# Altium PCB PCB1.PcbDoc
Units mm, origin at the board's own origin, x right, y up, seen from the top; angles counter-clockwise.
Board outline 28.38 x 43.64 mm, 4 copper layers (Top Layer, Signal Layer 1, Signal Layer 2, Bottom Layer), stack 0.756 mm thick; 27 components, 22 nets, 134 pads, 41 vias.
Unrouted connection lines stored in the file: 2.
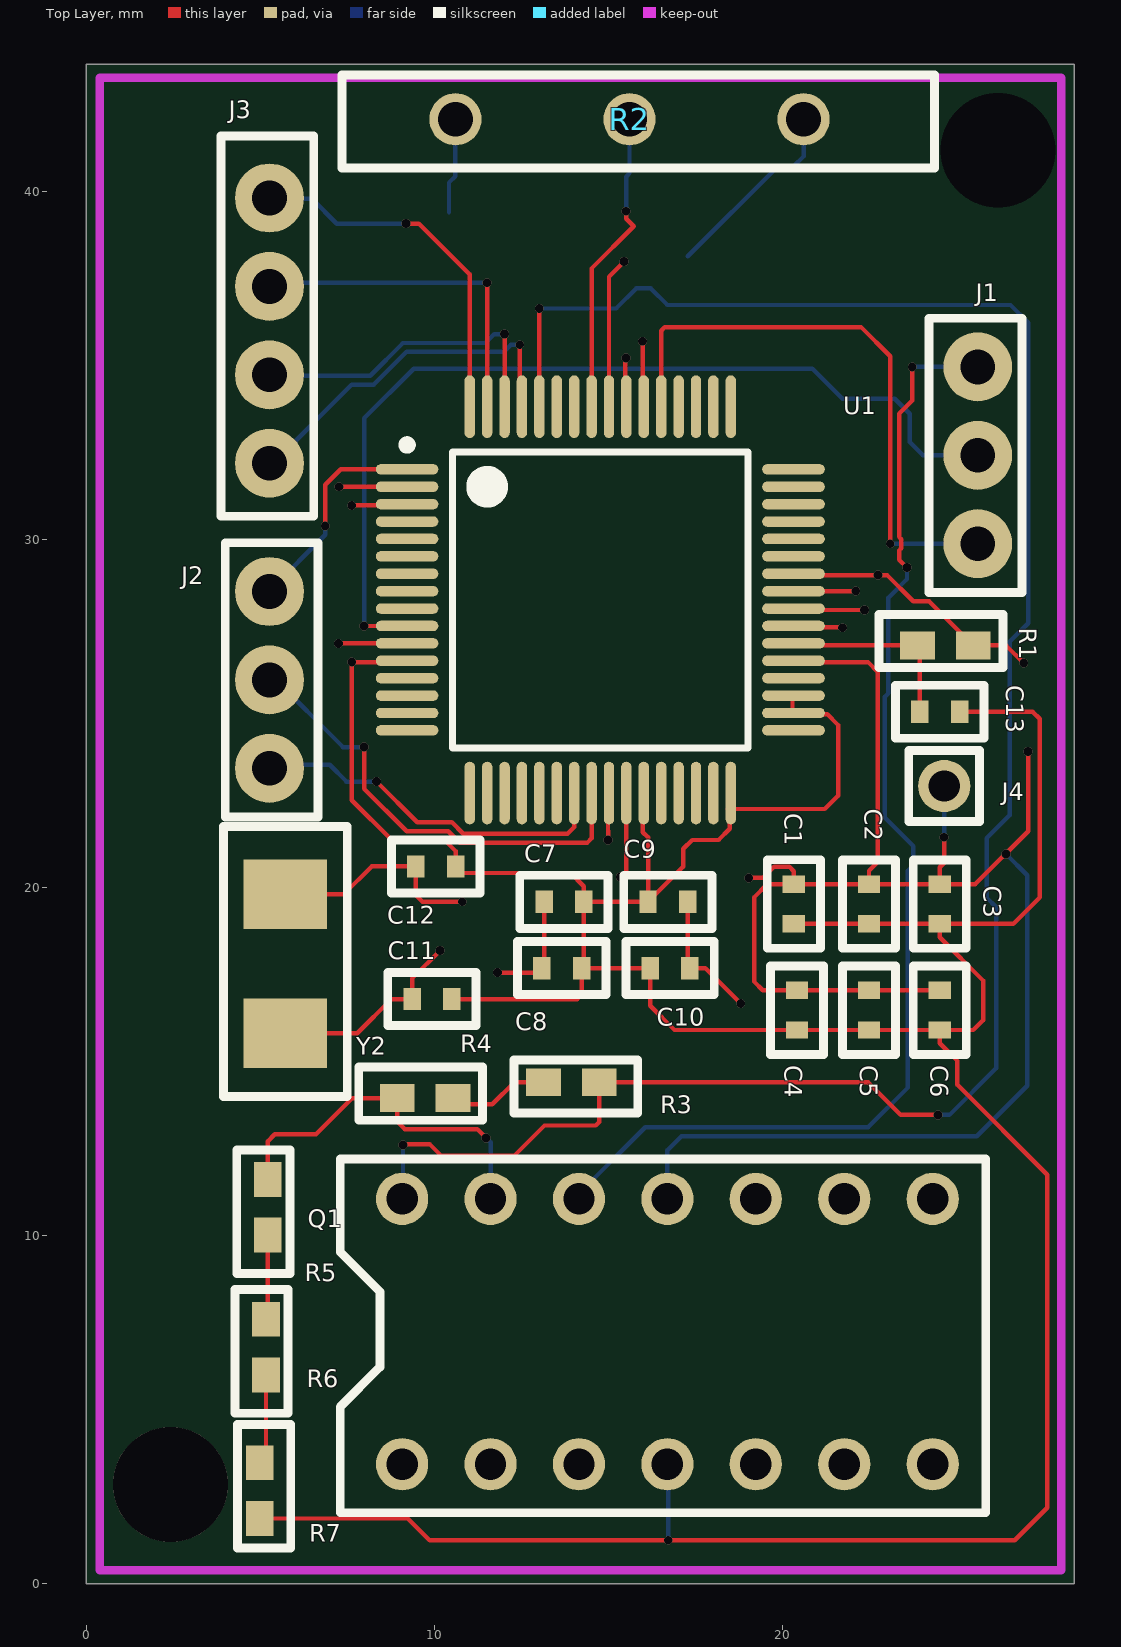
[diagram p0: Top Layer view]
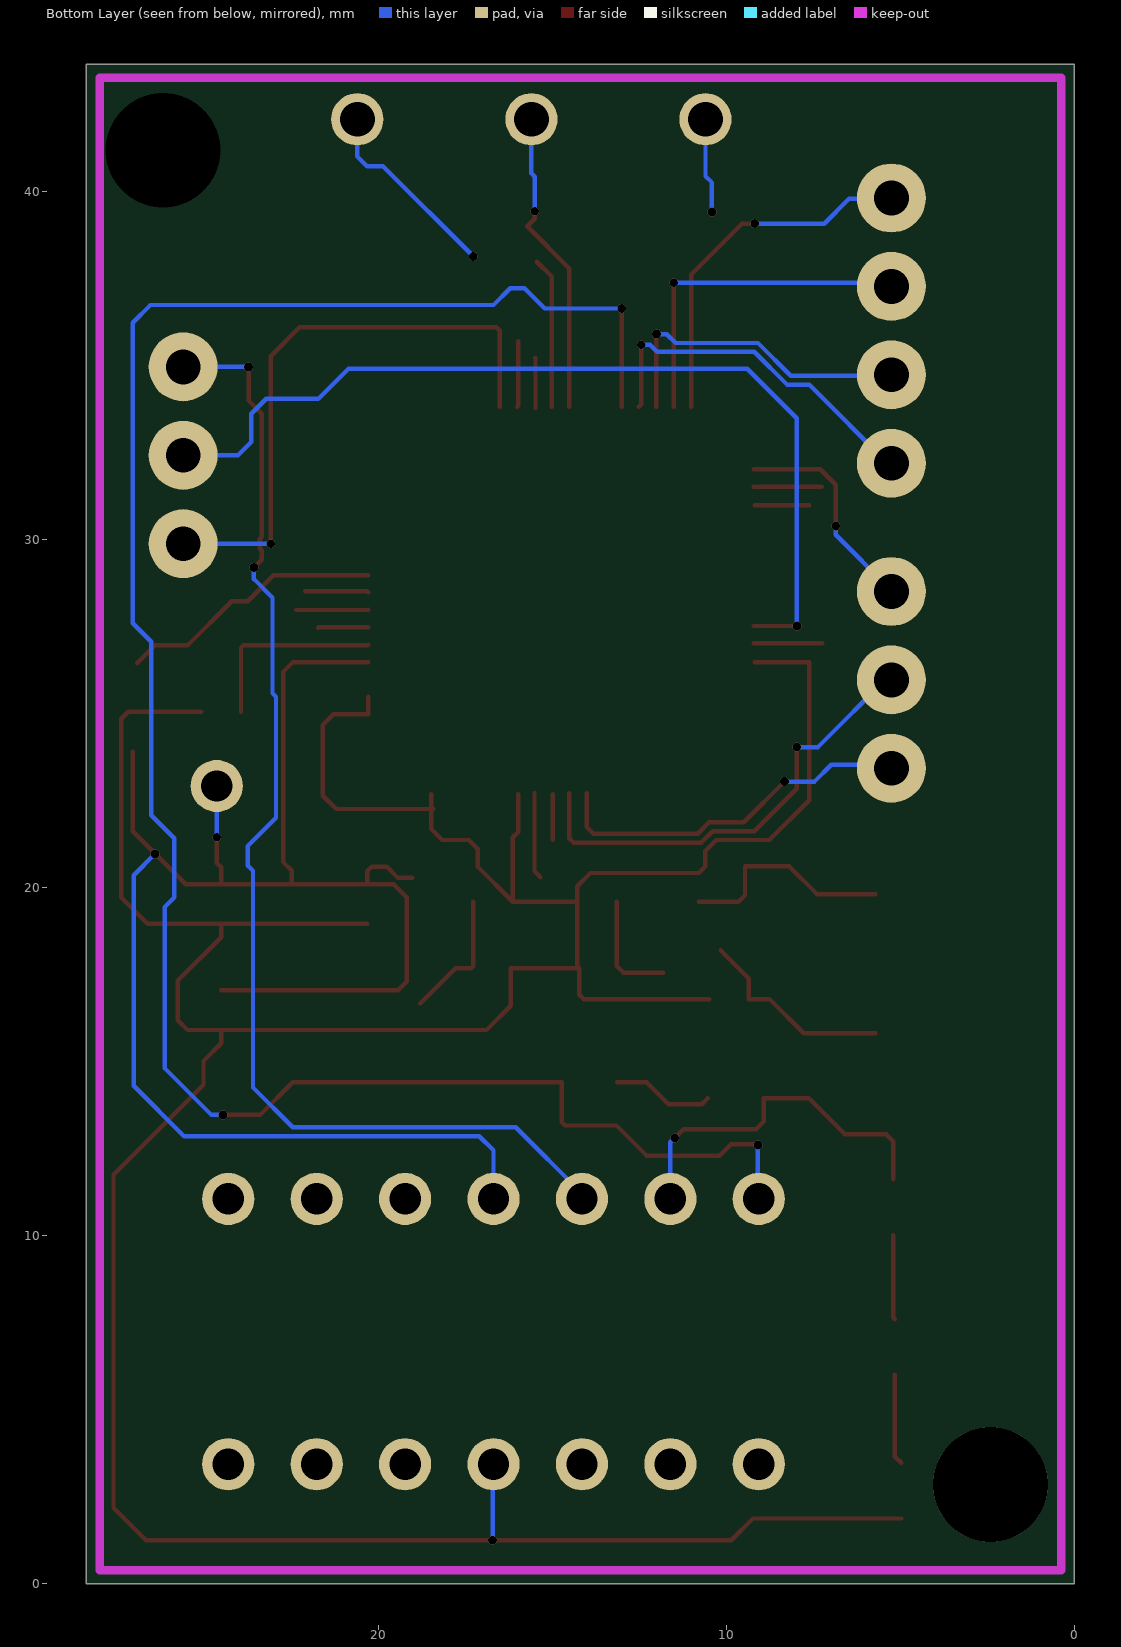
[diagram p1: Bottom Layer view, seen from below]
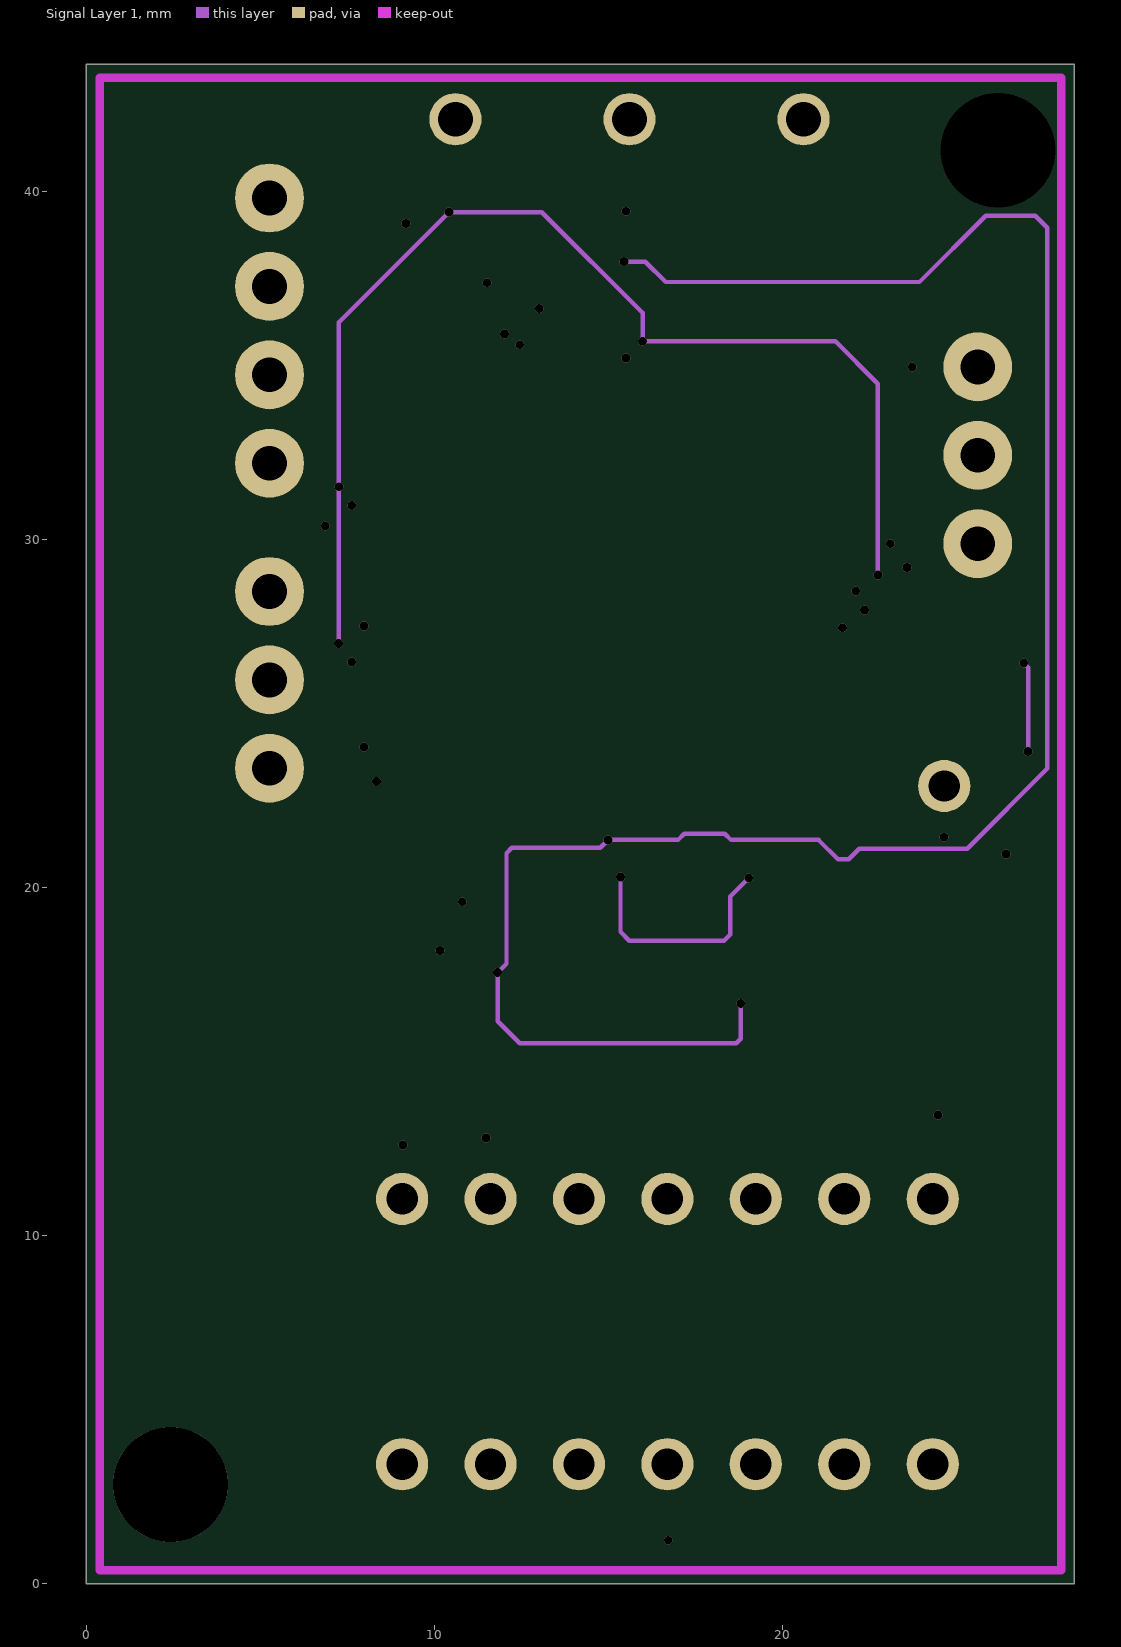
[diagram p2: Signal Layer 1]
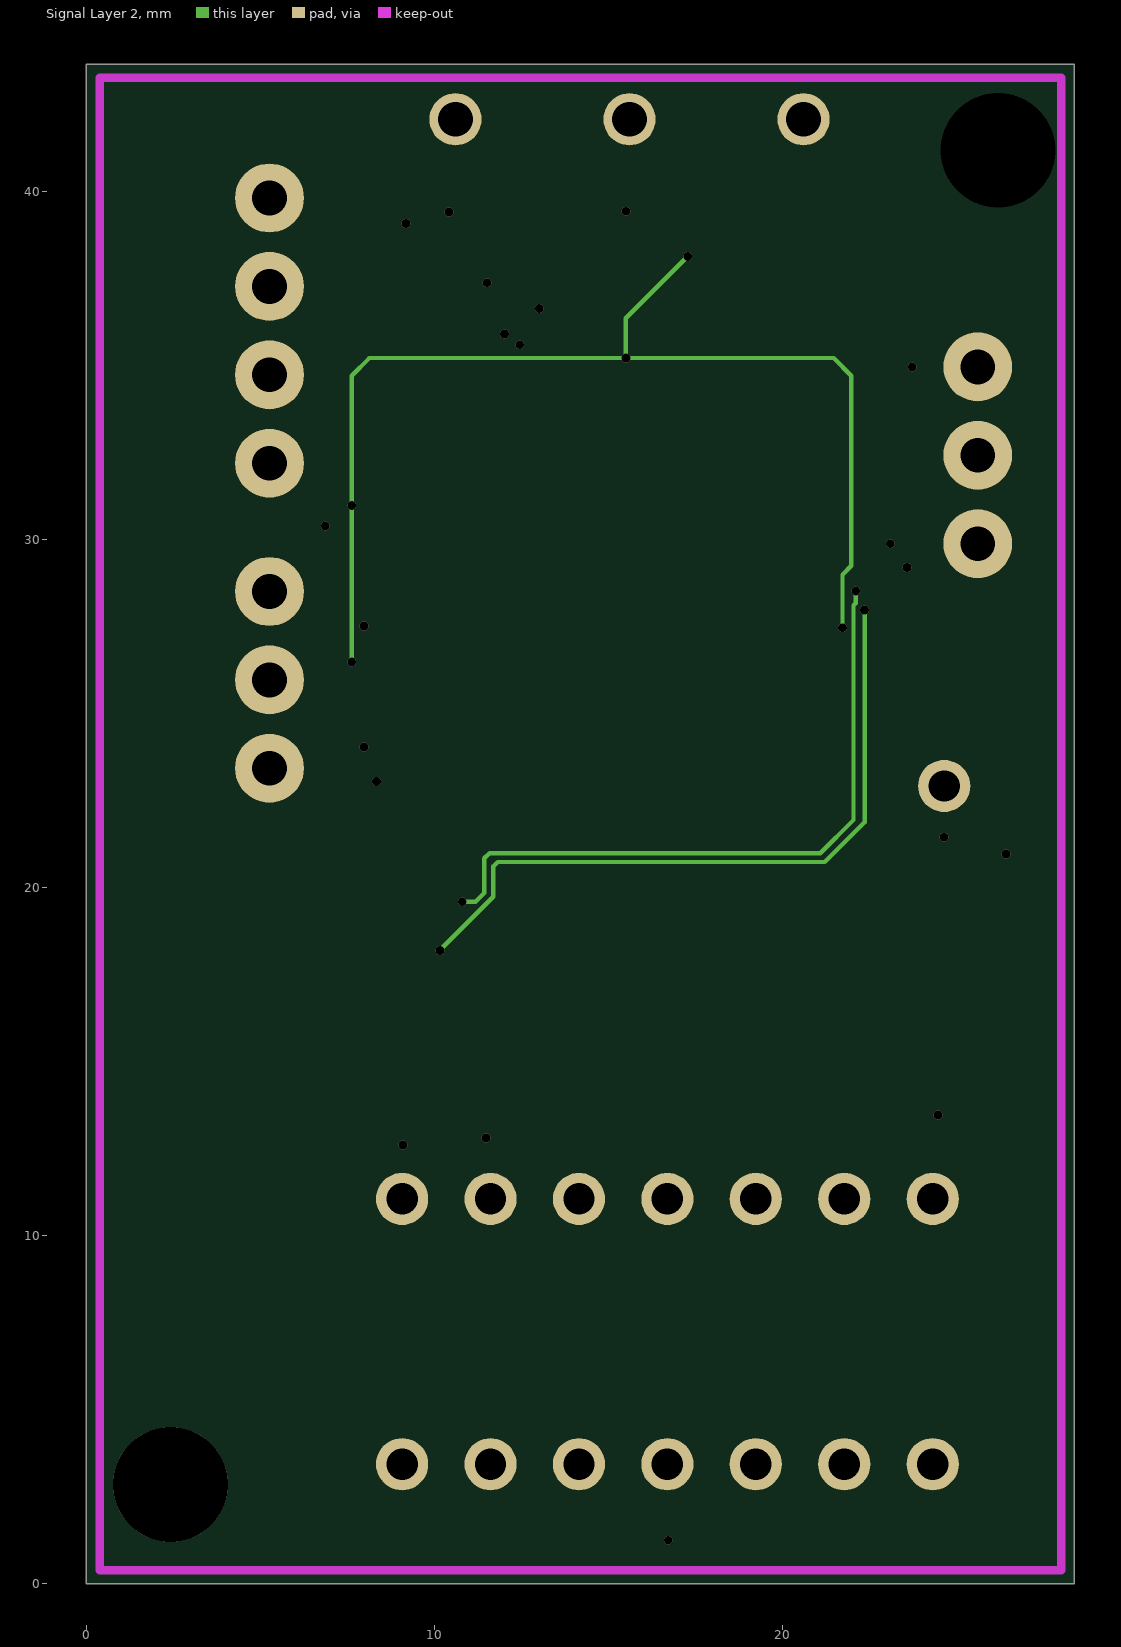
[diagram p3: Signal Layer 2]

## Layer stack, top to bottom
Top Solder: solder mask 0.0102, Solder Resist, Dk 3.5
Top Layer: signal copper 0.0432
Dielectric 1: core 0.254, FR-4, Dk 4.2
Signal Layer 1: signal copper 0.0175
Dielectric 3: prepreg 0.127, Dk 4.2
Signal Layer 2: signal copper 0.0175
Dielectric 2: core 0.254, Dk 4.2
Bottom Layer: signal copper 0.0432
Bottom Solder: solder mask 0.0102, Solder Resist, Dk 3.5

## Board outline
0,0 28.381,0 28.381,43.637 0,43.637

## Design rules (kind name [scope] priority, off if disabled: settings)
Clearance [All] p1: gap=0.127 ignorepadtopadclearanceinfootprint=FALSE
PolygonConnect [All] p1: connectstyle=Relief reliefconductorwidth=0.254 reliefentries=4 polygonreliefangle="90 Angle" airgapwidth=0.254
RoutingVias [All] p1: holewidth=0.254 width=0.102 viastyle="Through Hole" minholewidth=0.254 minwidth=0.102 maxholewidth=0.254 maxwidth=0.102
SolderMaskExpansion [All] p1: expansion=0.102
Width [All] p1: maxlimit=1 minlimit=0.127 preferedwidth=0.127
30 further rules are at their usual default settings.

## Classes and differential pairs
component class Esquematico_microcotrolador_actuador1: C1 C2 C3 C4 C5 C6 C7 C8 C9 C10 C11 C12 C13 Q1 R1 R2 R3 R4 R5 R6 R7 U1 Y2

## Components (designator, comment, footprint, x,y, rotation, side; value= is the part's Value field where it differs from the comment)
C1 "0.01uF" Capacitor 20.32,19.521 r90 top
C2 "0.1uF" Capacitor 22.479,19.518 r90 top
C3 "0.01uF" Capacitor 24.511,19.518 r90 top
C4 "0.1uF" Capacitor 20.414,16.47 r90 top
C5 "0.01uF" Capacitor 22.479,16.47 r90 top
C6 "1.0uF" Capacitor 24.511,16.47 r90 top
C7 "0.1uF" Capacitor 13.716,19.583 r180 top
C8 "0.1uF" Capacitor 13.654,17.678 r180 top
C9 "1.0uF" Capacitor 16.702,19.583 r0 top
C10 "2.2uF" Capacitor 16.764,17.678 r0 top
C11 "10pF" Capacitor 9.924,16.789 r0 top
C12 "10pF" Capacitor 10.033,20.599 r0 top
C13 "0.1uF" Capacitor 24.511,25.044 r180 top
J1 "HEADERS" 2_PIN_HEADER 25.603,29.87 r90 top
J2 "HEADERS" 2_PIN_HEADER 5.258,28.499 r270 top
J3 "4_HEADERS" 4_HEADERS 5.258,32.182 r90 top
J4 "1_HEADER" 1_HEADER 24.638,22.911 r0 top
Q1 "Op-amp" Op-amp 9.068,11.049 r0 top
R1 "10k" resistencia 24.676,26.949 r0 top
R2 "potenciometro" Potenciometro 15.599,42.062 r180 top
R3 "1k" resistencia 13.932,14.402 r180 top
R4 "2.7k" resistencia 9.728,13.945 r0 top
R5 "47" resistencia 5.207,10.808 r90 top
R6 "1k" resistencia 5.156,6.794 r90 top
R7 "10k" resistencia 4.978,2.667 r270 top
U1 "TM4C123GH6PMI7" PM0064A_N 14.76,28.257 r0 top
Y2 "Cristal_16MHz" cristal_16MHz 5.715,17.805 r90 top

## Footprints (in the part's own frame and the unit in brackets; to place one, negate y for a bottom-side part, rotate by r counter-clockwise, add the part's x,y. Pads: shape width x height; smd on the part's side, far side on the other; paste and mask are expansions set on the pad)
1_HEADER [mm]
  round 1.5 hole 0.9: 1(0,0)
  silkscreen extent -1.02,-1.02 1.02,1.02
2_PIN_HEADER [mm]
  round 1.98 hole 1: 1(0,0) 2(2.54,0) 3(5.08,0)
  silkscreen extent -1.4,-1.27 6.48,1.4
4_HEADERS [mm]
  round 1.98 hole 1: 1(0,0) 2(2.54,0) 3(5.08,0) 4(7.62,0)
  silkscreen extent -1.52,-1.27 9.4,1.4
Capacitor [mm]
  rect 0.5x0.64 smd: 1(-0.57,0)
  rect 0.5x0.64 smd mask+0.102: 2(0.57,0)
  silkscreen extent -1.27,-0.76 1.27,0.76, body extent -0.5,-0.25 0.5,0.25, height 0.5
cristal_16MHz [mm]
  rect 2x2.4 smd: 1(-2,0) 2(2,0)
  silkscreen extent -3.81,-1.78 3.94,1.78, body extent -2.44,-1.6 2.56,1.6, height 1.31
Op-amp [mm]
  round 1.5 hole 0.9: 1(0,0) 2(2.54,0) 3(5.08,0) 4(7.62,0) 5(10.16,0) 6(12.7,0) 7(15.24,0) 8(15.24,-7.62) 9(12.7,-7.62) 10(10.16,-7.62) 11(7.62,-7.62) 12(5.08,-7.62) 13(2.54,-7.62) 14(0,-7.62)
  silkscreen extent -1.78,-9.02 16.76,1.14, body extent -1.27,-7.87 16.51,0, height 4.3
PM0064A_N [mm]
  oval 1.8x0.3 smd paste-0.102 mask+0.051: 1(-5.55,3.75) 2(-5.55,3.25) 3(-5.55,2.75) 4(-5.55,2.25) 5(-5.55,1.75) 6(-5.55,1.25) 7(-5.55,0.75) 8(-5.55,0.25) 9(-5.55,-0.25) 10(-5.55,-0.75) 11(-5.55,-1.25) 12(-5.55,-1.75) 13(-5.55,-2.25) 14(-5.55,-2.75) 15(-5.55,-3.25) 16(-5.55,-3.75) 33(5.55,-3.75) 34(5.55,-3.25) 35(5.55,-2.75) 36(5.55,-2.25) 37(5.55,-1.75) 38(5.55,-1.25) 39(5.55,-0.75) 40(5.55,-0.25) 41(5.55,0.25) 42(5.55,0.75) 43(5.55,1.25) 44(5.55,1.75) 45(5.55,2.25) 46(5.55,2.75) 47(5.55,3.25) 48(5.55,3.75)
  oval 0.3x1.8 smd paste-0.102 mask+0.051: 17(-3.75,-5.55) 18(-3.25,-5.55) 19(-2.75,-5.55) 20(-2.25,-5.55) 21(-1.75,-5.55) 22(-1.25,-5.55) 23(-0.75,-5.55) 24(-0.25,-5.55) 25(0.25,-5.55) 26(0.75,-5.55) 27(1.25,-5.55) 28(1.75,-5.55) 29(2.25,-5.55) 30(2.75,-5.55) 31(3.25,-5.55) 32(3.75,-5.55) 49(3.75,5.55) 50(3.25,5.55) 51(2.75,5.55) 52(2.25,5.55) 53(1.75,5.55) 54(1.25,5.55) 55(0.75,5.55) 56(0.25,5.55) 57(-0.25,5.55) 58(-0.75,5.55) 59(-1.25,5.55) 60(-1.75,5.55) 61(-2.25,5.55) 62(-2.75,5.55) 63(-3.25,5.55) 64(-3.75,5.55)
  silkscreen extent -5.67,-4.25 4.25,4.57, body extent -5.79,-5.79 5.79,5.79, height 1
Potenciometro [mm]
  round 1.5 hole 1: 1(-5,0) 2(5,0) 3(0,0)
  silkscreen extent -8.76,-1.27 8.25,1.4, body extent -7.97,-22.13 8.13,5.87, height 21.5
resistencia [mm]
  rect 1x0.8 smd: 1(-0.8,0) 2(0.8,0)
  silkscreen extent -1.91,-0.64 1.65,0.89, body extent -0.95,-0.4 0.95,0.4, height 0.45

## Part data
C1 C2 C3 C4 C5 C6 C7 C8 C9 C10 C11 C12 C13: library part CAP_0.01uF, Supplier Part Number 1=587-1223-6-ND, Supplier 1=Digi-Key
R1 R3 R4 R5 R6 R7: library part Resisistencia
U1: "No Description Available", Alternate_PartNumber=TM4C123GH6PMT, Manufacturer="Texas Instruments", PartNumber=TM4C123GH6PMTR, CompType=IC, Copyright="Copyright (C) 2021 Ultra Librarian. All rights reserved.", Manufacturer_Part_Number=TM4C123GH6PMI7, Mfr_Name="Texas Instruments", MountType=SMT, PackageReference=PM0064A, RefDes=RefDes, RoHS=Y, Type=DEV

## Free pads (board coordinates)
  round 1.524 hole 3.3: 40(26.187,41.173)
  round 3.3 hole 3.3: 41(2.413,2.845)

## Via types
v1: diameter 0.254, hole 0.254, Top Layer to Bottom Layer, 19 vias
v2: diameter 0.254, hole 0.254, Top Layer to Signal Layer 1, 12 vias
v3: diameter 0.254, hole 0.254, Top Layer to Signal Layer 2, 8 vias
v4: diameter 0.254, hole 0.254, Signal Layer 1 to Bottom Layer, 1 vias
v5: diameter 0.254, hole 0.254, Signal Layer 2 to Bottom Layer, 1 vias

## Nets (pads, with @x,y where several pads share a name; then routed paths per layer and width w, separated by ;. In a path a pad name is that pad's centre, name@x,y a point inside that pad or via, vN(x,y) a via of type N, cw(c..) or ccw(c..) an arc to the next point about the centre after c; other vN are vias at no path point)
+3.3V: C1.2 C2.2 C3.2 C4.2 C5.2 C6.2 J4.1 Q1.4 R1.2 R2.2 U1.2 U1.11 U1.26 U1.37 U1.42 U1.54 | length 113.8
  Top Layer w0.127: v2(7.239,27.007) U1.11 ; v2(7.253,31.507) U1.2 ; v2(15.342,20.295) 15.51,20.463 U1.26 ; v2(15.977,35.687) 15.977,33.841 U1.54 ; v2(19.025,20.269) 19.431,20.269 19.758,20.596 20.187,20.596 20.32,20.464 C1.2 ; U1.37@20.282,26.469 22.451,26.469 22.733,26.187 22.733,20.726 22.479,20.472 C2.2 ; U1.42@20.282,28.969 v2(22.733,28.969) 22.999,28.969 23.749,28.219 24.206,28.219 R1.2 26.416,26.949 v2(26.924,26.441) ; C6.2 C5.2 C4.2 19.431,17.04 19.177,17.294 19.177,19.71 19.558,20.091 C1.2 ; v1(24.638,21.438) 24.638,20.701 24.511,20.574 C3.2 ; v2(27.051,23.901) 27.051,21.612 25.527,20.088 C3.2 ; C1.2 22.476,20.091 C2.2 ; C2.2 C3.2
  Signal Layer 1 w0.127: v2(7.239,27.007) 7.253,27.021 v2(7.253,31.507) 7.253,36.234 v4(10.414,39.395) 13.081,39.395 15.977,36.5 v2(15.977,35.687) 21.514,35.687 22.733,34.468 v2(22.733,28.969) ; v2(15.342,20.295) 15.342,18.72 15.596,18.466 18.313,18.466 18.491,18.644 18.491,19.736 v2(19.025,20.269) ; v2(26.924,26.441) 27.051,26.314 v2(27.051,23.901)
  Bottom Layer w0.127: v4(10.414,39.395) 10.414,40.244 10.599,40.429 R2.2 ; Q1.4 16.688,12.446 17.094,12.852 25.578,12.852 27.026,14.3 27.026,20.345 v1(26.416,20.955) ; v1(24.638,21.438) J4.1
GND: C1.1 C2.1 C3.1 C4.1 C5.1 C6.1 C7.1 C8.1 C9.1 C10.1 C11.2 C12.2 C13.1 pad.40 pad.41 Q1.11 R2.1 R7.2 U1.3 U1.12 U1.27 U1.32 U1.34 U1.35 U1.39 U1.55 | length 157.2
  Top Layer w0.127: pad.41 2.362,3.581 3.2,2.743 3.2,2.311 pad.41@3.645,1.867 ; R7.2 9.233,1.867 9.855,1.245 v1(16.713,1.245) 26.67,1.245 27.604,2.178 27.604,11.741 25.019,14.326 25.019,15.011 24.511,15.519 C6.1 ; v3(7.62,30.969) U1.3@9.182,30.969 ; U1.12@9.182,26.469 v3(7.62,26.469) 7.62,22.504 8.766,21.358 10.287,21.358 10.603,21.042 C12.2 10.792,20.41 13.905,20.41 14.286,20.029 C7.1 ; C11.2 14.097,16.789 14.224,16.916 C8.1 ; U1.55@15.482,33.769 15.482,35.192 v3(15.494,35.204) ; U1.27@15.982,22.669 15.982,21.585 16.132,21.435 C9.1 ; U1.32@18.482,22.669 U1.32@18.482,22.317 ; U1.35@20.282,25.469 20.282,24.969 21.284,24.969 21.59,24.663 21.59,22.631 21.209,22.25 U1.32@18.482,22.25 ; U1.39@20.282,27.469 21.705,27.469 v3(21.717,27.457) ; C1.1 22.476,18.951 C2.1 C3.1 ; C13.1 27.178,25.044 27.381,24.841 27.381,19.71 26.619,18.948 C3.1 ; 25.298,42.062 pad.40 ; C8.1 C10.1 16.194,16.597 16.891,15.9 C4.1 C5.1 C6.1 ; C8.1 14.286,17.74 C7.1 ; C7.1 C9.1 ; C9.1 17.145,20.596 17.145,21.104 17.399,21.358 18.158,21.358 18.482,21.682 U1.32@18.482,22.25 ; U1.32@18.482,22.25 18.415,22.25 U1.32@18.482,22.317 ; U1.32@18.482,22.25 U1.32@18.482,22.317 ; C6.1 25.476,15.9 25.756,16.18 25.756,17.323 24.511,18.567 C3.1
  Signal Layer 2 w0.127: v3(7.62,26.469) v3(7.62,30.969) 7.62,34.696 8.128,35.204 v3(15.494,35.204) ; v5(17.272,38.125) 15.494,36.347 v3(15.494,35.204) ; v3(21.717,27.457) 21.717,28.981 21.971,29.235 21.971,34.696 21.463,35.204 v3(15.494,35.204)
  Bottom Layer w0.127: Q1.11 16.713,3.404 v1(16.713,1.245) ; v5(17.272,38.125) 19.863,40.716 20.32,40.716 20.599,40.996 R2.1
NetC7_2: C7.2 C8.2 C9.2 C10.2 U1.25 U1.56 | length 72
  Top Layer w0.127: v2(11.811,17.551) 12.957,17.551 C8.2 13.146,17.74 C7.2 ; U1.25@14.982,22.669 14.982,21.629 14.986,21.625 v2(14.986,21.361) ; U1.56 15.01,37.54 v2(15.443,37.973) ; C9.2 17.272,17.74 C10.2 17.78,17.678 v2(18.796,16.662)
  Signal Layer 1 w0.127: v2(15.443,37.973) 16.053,37.973 16.637,37.389 23.927,37.389 25.832,39.294 27.254,39.294 27.604,38.944 27.604,23.413 25.298,21.107 22.2,21.107 21.895,20.803 21.59,20.803 21.031,21.361 18.517,21.361 18.339,21.539 17.17,21.539 16.993,21.361 v2(14.986,21.361) 14.757,21.133 12.217,21.133 12.065,20.98 12.065,17.805 v2(11.811,17.551) 11.811,16.154 12.446,15.519 18.669,15.519 18.796,15.646 v2(18.796,16.662)
NetC11_1: C11.1 U1.40 Y2.1 | length 28.2
  Top Layer w0.127: Y2.1 7.779,15.805 8.763,16.789 C11.1 9.354,17.38 v3(10.16,18.186) ; U1.40@20.282,27.969 20.286,27.965 v3(22.352,27.965)
  Signal Layer 2 w0.127: v3(10.16,18.186) 10.16,18.208 11.684,19.732 11.684,20.599 11.811,20.726 21.209,20.726 22.352,21.869 v3(22.352,27.965)
NetC12_1: C12.1 U1.41 Y2.2 | length 27.5
  Top Layer w0.127: Y2.2 7.398,19.805 8.192,20.599 C12.1 9.463,19.772 9.652,19.583 v3(10.795,19.583) ; U1.41@20.282,28.469 20.32,28.507 v3(22.098,28.507)
  Signal Layer 2 w0.127: v3(10.795,19.583) 11.176,19.583 11.43,19.837 11.43,20.832 11.579,20.98 21.082,20.98 22.034,21.933 22.034,28.097 22.098,28.16 v3(22.098,28.507)
NetC13_2: C13.2 R1.1 U1.38 | length 5.5
  Top Layer w0.127: U1.38@20.282,26.969 20.302,26.949 R1.1 23.941,26.884 C13.2
NetJ1_1: J1.1 U1.53 | length 17.1
  Top Layer w0.127: U1.53 16.51,35.992 16.612,36.093 22.25,36.093 23.089,35.255 v1(23.089,29.87)
  Bottom Layer w0.127: v1(23.089,29.87) J1.1@25.654,29.87
NetJ1_2: J1.2 U1.10 | length 27
  Top Layer w0.127: v1(7.975,27.507) U1.10
  Bottom Layer w0.127: v1(7.975,27.507) 7.975,33.476 9.398,34.9 20.853,34.9 21.717,34.036 23.216,34.036 23.647,33.604 23.647,32.791 24.028,32.41 J1.2 J1.2@25.654,32.41
NetJ1_3: J1.3 Q1.3 | length 34.4
  Top Layer w0.127: v1(23.571,29.185) 23.343,29.413 23.343,29.675 23.406,29.739 23.406,30.002 23.343,30.065 23.343,33.604 23.724,33.985 v1(23.724,34.95)
  Bottom Layer w0.127: Q1.3 14.148,11.201 16.053,13.106 22.454,13.106 23.597,14.249 23.597,20.472 23.749,20.625 23.749,21.184 22.936,21.996 22.936,25.476 23.038,25.578 23.038,28.321 23.571,28.854 v1(23.571,29.185) ; v1(23.724,34.95) J1.3
NetJ2_1: J2.1 U1.1 | length 6.1
  Top Layer w0.127: v1(6.858,30.378) 6.858,31.561 7.304,32.007 U1.1
  Bottom Layer w0.127: J2.1@5.334,28.6 6.858,30.124 v1(6.858,30.378)
NetJ2_2: J2.2 U1.24 | length 13.2
  Top Layer w0.127: v1(7.976,24.028) 7.976,22.835 9.198,21.612 10.392,21.612 10.719,21.285 14.39,21.285 14.51,21.406 U1.24
  Bottom Layer w0.127: J2.2@5.334,26.06 7.366,24.028 v1(7.976,24.028)
NetJ2_3: J2.3 U1.23 | length 10.6
  Top Layer w0.127: v1(8.331,23.038) 9.503,21.866 10.497,21.866 10.825,21.539 13.818,21.539 14.01,21.732 U1.23
  Bottom Layer w0.127: J2.3@5.334,23.52 6.985,23.52 7.468,23.038 v1(8.331,23.038)
NetJ3_1: J3.1 U1.61 | length 10.3
  Top Layer w0.127: v1(12.446,35.585) 12.446,33.871 U1.61
  Bottom Layer w0.127: J3.1@5.334,32.156 7.62,34.442 8.255,34.442 9.195,35.382 11.989,35.382 12.192,35.585 v1(12.446,35.585)
NetJ3_2: J3.2 U1.62 | length 9.3
  Top Layer w0.127: U1.62 v1(12.01,35.89)
  Bottom Layer w0.127: J3.2@5.334,34.696 8.15,34.696 9.09,35.636 11.455,35.636 11.709,35.89 v1(12.01,35.89)
NetJ3_3: J3.3 U1.63 | length 9.8
  Top Layer w0.127: U1.63 v1(11.51,37.367)
  Bottom Layer w0.127: J3.3@5.334,37.236 5.465,37.367 v1(11.51,37.367)
NetJ3_4: J3.4 U1.64 | length 10.4
  Top Layer w0.127: v1(9.182,39.065) 9.55,39.065 11.01,37.606 U1.64
  Bottom Layer w0.127: J3.4@5.334,39.776 6.477,39.776 7.188,39.065 v1(9.182,39.065)
NetQ1_1: Q1.1 R3.1 U1.60 | length 60.8
  Top Layer w0.127: v1(9.093,12.598) 9.119,12.624 9.855,12.624 10.185,12.294 12.294,12.294 13.157,13.157 14.63,13.157 14.732,13.259 R3.1 22.454,14.402 23.393,13.462 v1(24.46,13.462) ; v1(13.005,36.627) 13.005,33.813 U1.60
  Bottom Layer w0.127: Q1.1 9.093,11.074 v1(9.093,12.598) ; v1(13.005,36.627) 15.215,36.627 15.799,37.211 16.205,37.211 16.688,36.728 26.543,36.728 27.051,36.22 27.051,27.584 26.518,27.051 26.518,22.073 25.857,21.412 25.857,19.71 26.137,19.431 26.137,14.808 24.79,13.462 v1(24.46,13.462)
NetQ1_2: Q1.2 R4.1 R5.2 | length 10.6
  Top Layer w0.127: R5.2 5.207,12.7 5.41,12.903 6.593,12.903 7.634,13.945 R4.1 8.928,13.271 9.144,13.056 11.227,13.056 v1(11.481,12.802)
  Bottom Layer w0.127: v1(11.481,12.802) 11.608,12.675 Q1.2
NetR2_3: R2.3 U1.57 | length 8.9
  Top Layer w0.127: U1.57 14.51,37.776 15.723,38.989 15.503,39.208 v1(15.503,39.421)
  Bottom Layer w0.127: v1@15.494,39.411 v1(15.503,39.421) 15.503,40.413 15.599,40.509 R2.3
NetR3_2: R3.2 R4.2 | length 2.9
  Top Layer w0.127: R4.2 10.706,13.767 11.659,13.767 12.294,14.402 R3.2
NetR5_1: R5.1 R6.2 | length 2.4
  Top Layer w0.127: R6.2 5.207,7.645 R5.1
NetR6_1: R6.1 R7.1 | length 2.6
  Top Layer w0.127: R7.1 5.156,3.645 R6.1
pads on no net: Q1.5 Q1.6 Q1.7 Q1.8 Q1.9 Q1.10 Q1.12 Q1.13 Q1.14 U1.4 U1.5 U1.6 U1.7 U1.8 U1.9 U1.13 U1.14 U1.15 U1.16 U1.17 U1.18 U1.19 U1.20 U1.21 U1.22 U1.28 U1.29 U1.30 U1.31 U1.33 U1.36 U1.43 U1.44 U1.45 U1.46 U1.47 U1.48 U1.49 U1.50 U1.51 U1.52 U1.58 U1.59

## Keep-outs
Keep-Out Layer:
  lines w0.254: 0.381,0.381 28,0.381 28,43.256 0.381,43.256 0.381,0.381